# Altium PCB 步进电机驱动板.PcbDoc
Units mil, origin at the board's own origin, x right, y up, seen from the top; angles counter-clockwise.
Board outline 3937.01 x 2795.28 mil, 2 copper layers (Top Layer, Bottom Layer); 91 components, 51 nets, 295 pads, 58 vias.
Unrouted connection lines stored in the file: 1.
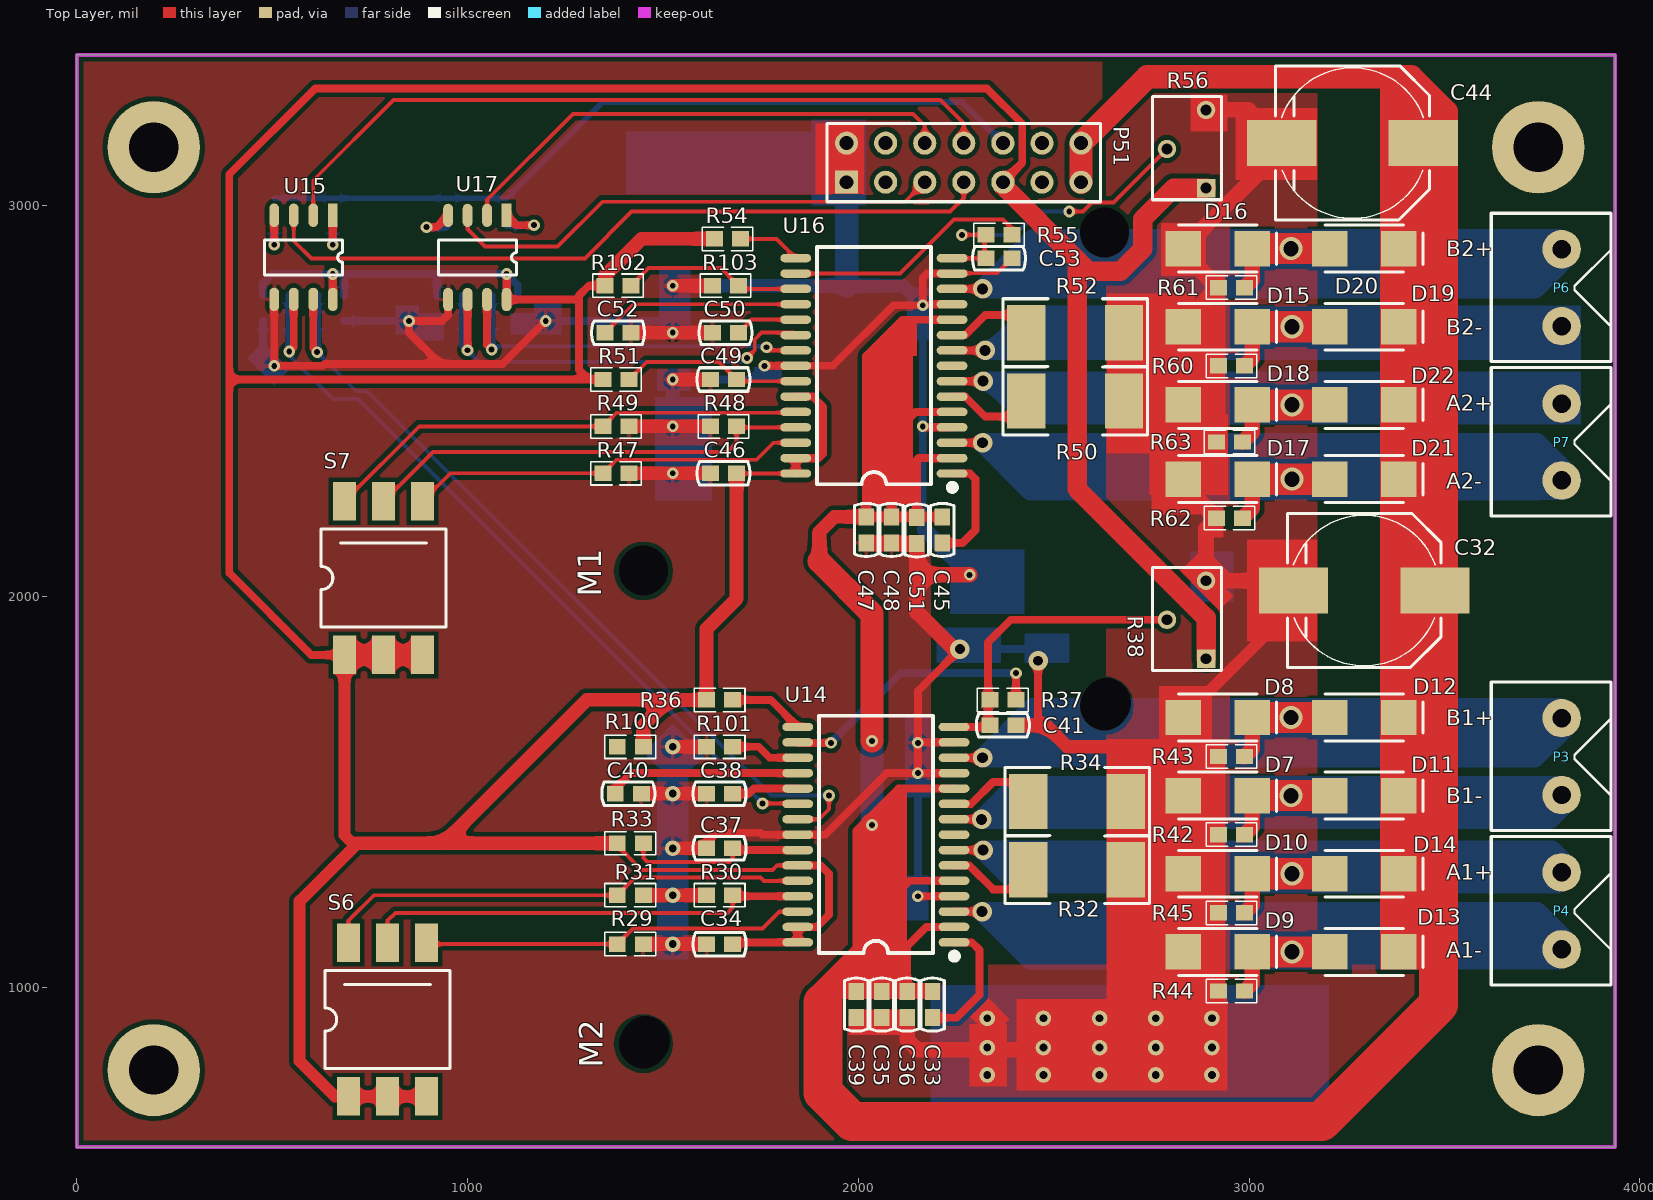
[diagram p0: Top Layer view]
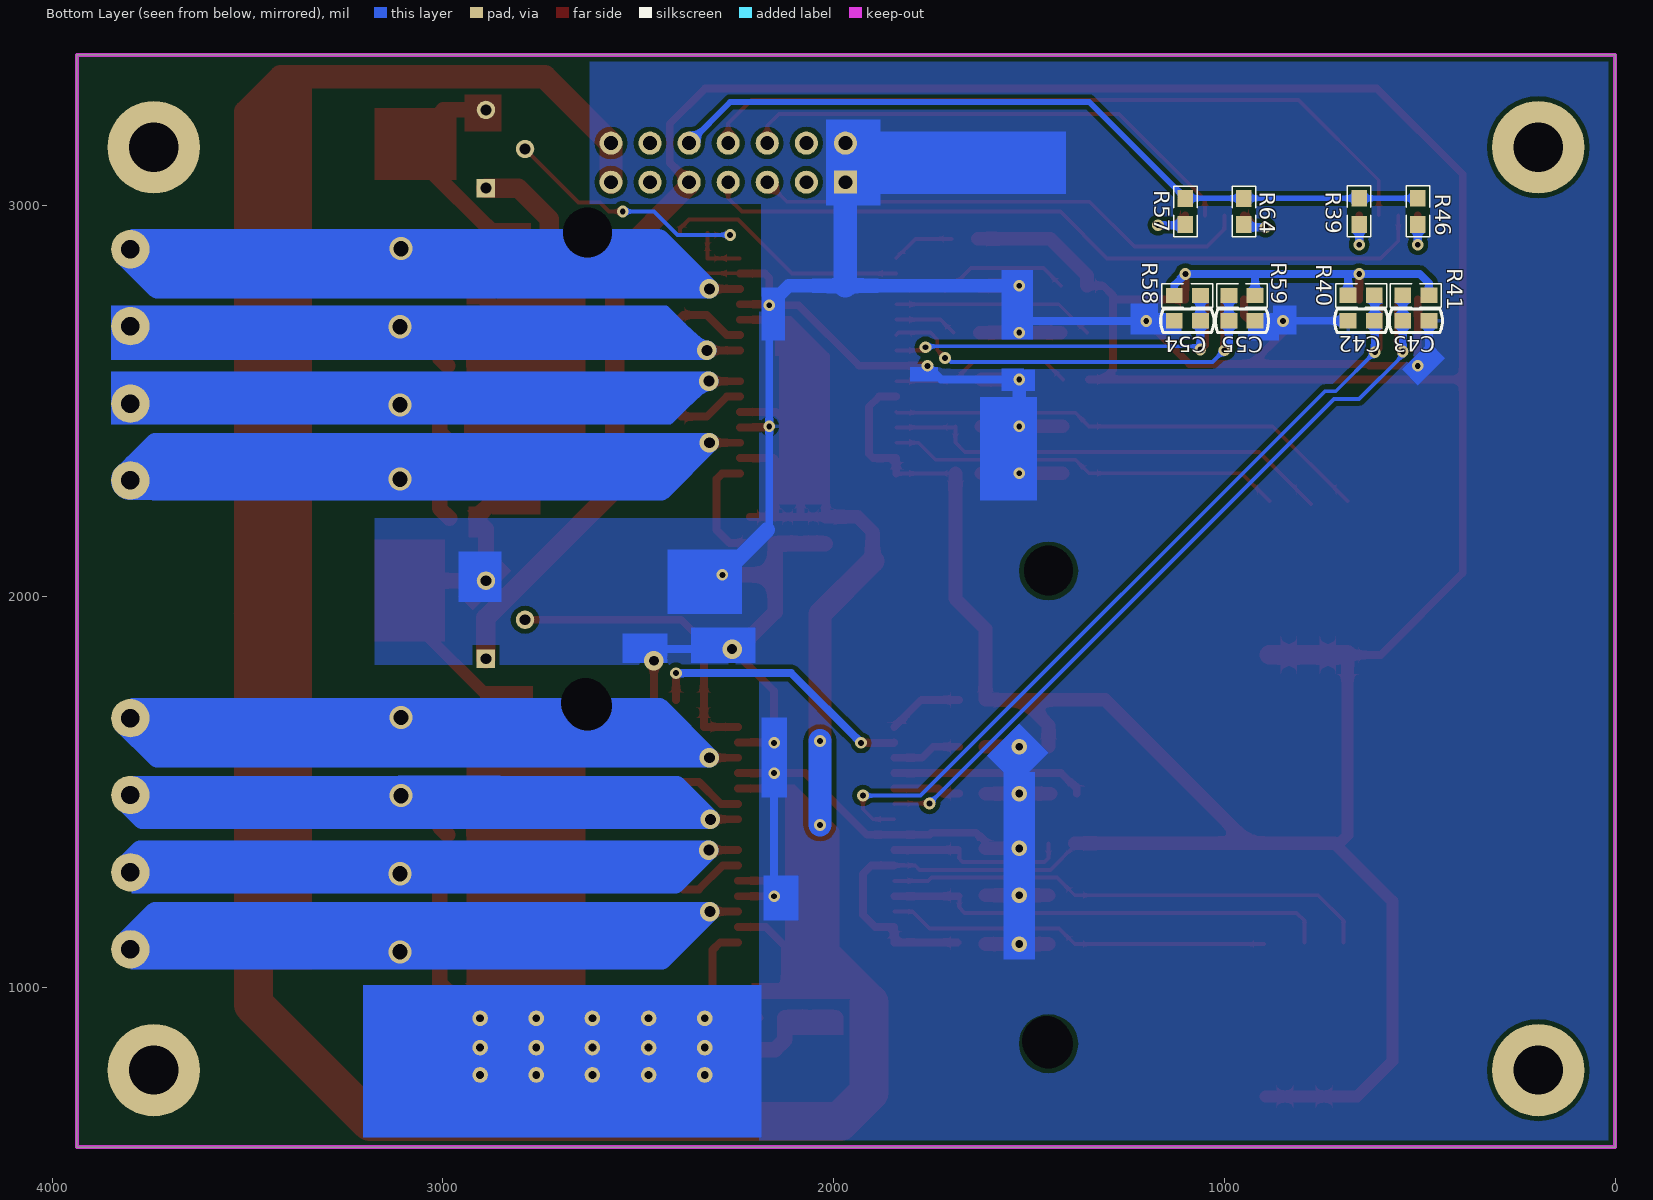
[diagram p1: Bottom Layer view, seen from below]
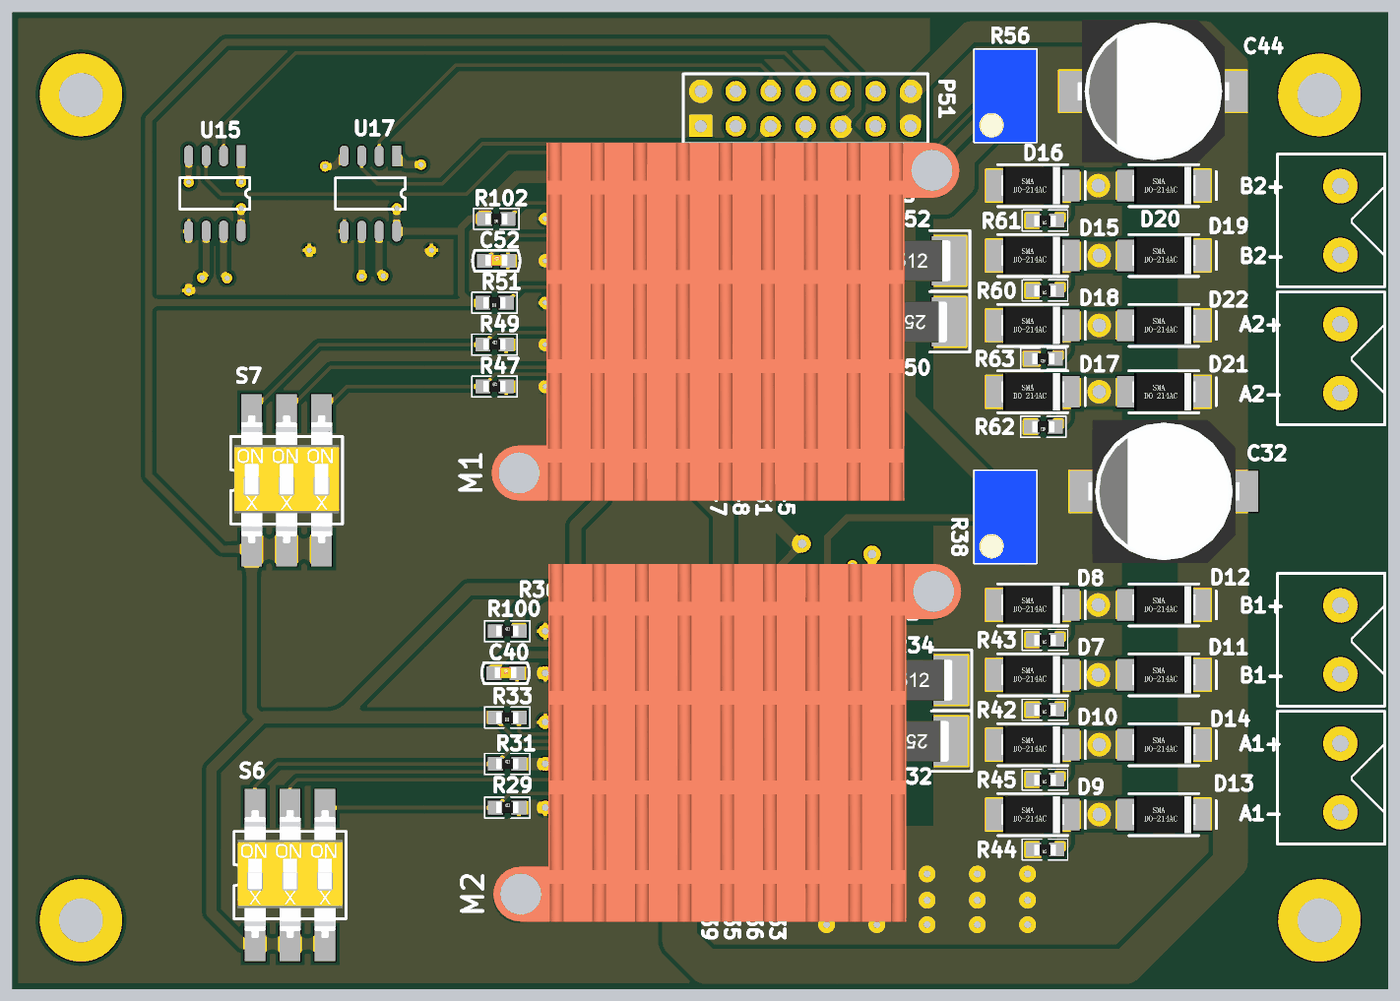
[diagram p2: 3D render of the assembled board from above, using the file's embedded part models]
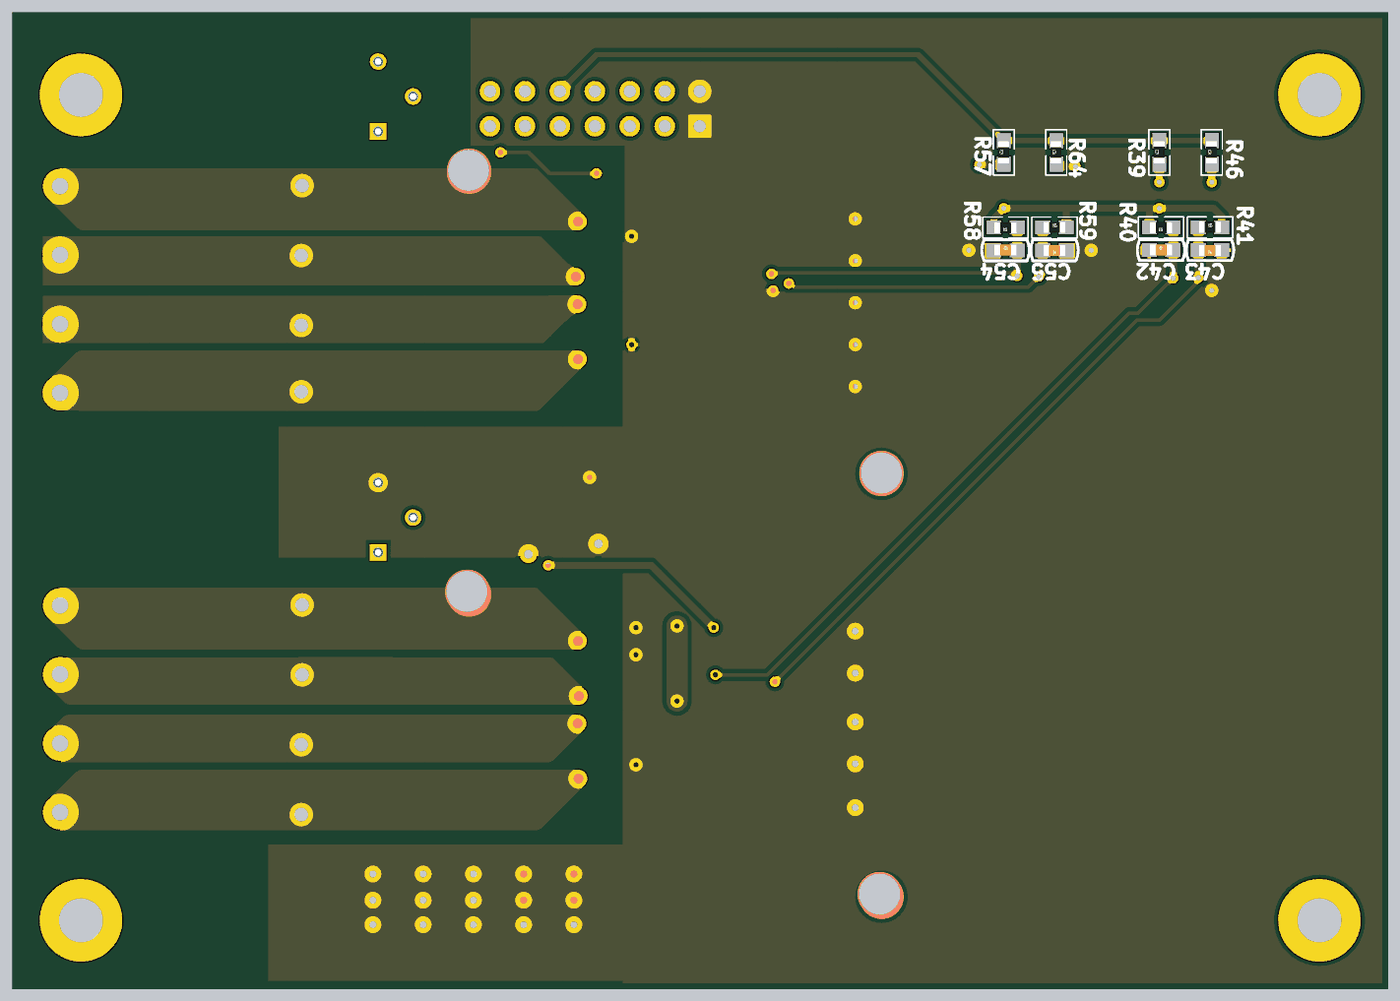
[diagram p3: 3D render of the assembled board from below, using the file's embedded part models]

## Layer stack, top to bottom
Top Solder: solder mask 0.4, Solder Resist, Dk 3.5
Top Layer: signal copper 1.4
Dielectric 1: dielectric 12.6, FR-4, Dk 4.8
Bottom Layer: signal copper 1.4
Bottom Solder: solder mask 0.4, Solder Resist, Dk 3.5

## Board outline
0,590.55 3937.01,590.55 3937.01,3385.83 0,3385.83

## Design rules (kind name [scope] priority, off if disabled: settings)
Clearance [All] p1: gap=7
PolygonConnect [All] p1: connectstyle=Relief reliefconductorwidth=10 reliefentries=4 polygonreliefangle="90 Angle" airgapwidth=10
RoutingVias [All] p1: holewidth=20 width=30 viastyle="Through Hole" minholewidth=15 minwidth=30 maxholewidth=30 maxwidth=60
SolderMaskExpansion [All] p1: expansion=4
Width [All] p1: maxlimit=100 minlimit=10 preferedwidth=20
30 further rules are at their usual default settings.

## Classes and differential pairs
component class 升降电机驱动: C44 C45 C46 C47 C48 C49 C50 C51 C52 C53 C54 C55 D15 D16 D17 D18 D19 D20 D21 D22 P6 P7 R47 R48 R49 R50 R51 R52 R54 R55 R56 R57 R58 R59 R60 R61 R62 R63 R64 R102 R103 S7 U16 U17
component class 搅拌驱动驱动: C32 C33 C34 C35 C36 C37 C38 C39 C40 C41 C42 C43 D7 D8 D9 D10 D11 D12 D13 D14 M1 M2 P3 P4 P51 R29 R30 R31 R32 R33 R34 R36 R37 R38 R39 R40 R41 R42 R43 R44 R45 R46 R100 R101 S6 U14 U15

## Components (designator, comment, footprint, x,y, rotation, side; value= is the part's Value field where it differs from the comment)
C32 "Cap Pol" C-RB-S10 3295,2015 r180 top
C33 "Cap" C-RAD-0603 2190,955 r270 top
C34 "Cap" C-RAD-0603 1645,1110 r180 top
C35 "Cap" C-RAD-0603 2060,955 r90 top
C36 "Cap" C-RAD-0603 2125,955 r90 top
C37 "Cap" C-RAD-0603 1645,1355 r0 top
C38 "Cap" C-RAD-0603 1645,1495 r180 top
C39 "Cap" C-RAD-0603 1995,955 r90 top
C40 "Cap" C-RAD-0603 1411.47,1495 r0 top
C41 "Cap" C-RAD-0603 2370,1670 r180 top
C42 "Cap" C-RAD-0603 650,2705.35 r180 bottom
C43 "Cap" C-RAD-0603 510,2705.35 r0 bottom
C44 "Cap Pol" C-RB-S10 3265,3160 r180 top
C45 "Cap" C-RAD-0603 2215,2170 r270 top
C46 "Cap" C-RAD-0603 1655,2315 r180 top
C47 "Cap" C-RAD-0603 2020,2170 r90 top
C48 "Cap" C-RAD-0603 2085,2170 r90 top
C49 "Cap" C-RAD-0603 1655,2555 r0 top
C50 "Cap" C-RAD-0603 1660,2675 r180 top
C51 "Cap" C-RAD-0603 2150,2168.46 r90 top
C52 "Cap" C-RAD-0603 1385,2675 r0 top
C53 "Cap" C-RAD-0603 2360,2865 r180 top
C54 "Cap" C-RAD-0603 1095,2705 r180 bottom
C55 "Cap" C-RAD-0603 955,2705 r0 bottom
D7 "D-Schottky" DIODE-SMA 2920,1490 r0 top
D8 "D-Schottky" DIODE-SMA 2920,1690 r0 top
D9 "D-Schottky" DIODE-SMA 2920,1090 r0 top
D10 "D-Schottky" DIODE-SMA 2920,1290 r0 top
D11 "D-Schottky" DIODE-SMA 3295,1490 r0 top
D12 "D-Schottky" DIODE-SMA 3295,1690 r0 top
D13 "D-Schottky" DIODE-SMA 3295,1090 r0 top
D14 "D-Schottky" DIODE-SMA 3295,1290 r0 top
D15 "D-Schottky" DIODE-SMA 2920,2690 r0 top
D16 "D-Schottky" DIODE-SMA 2920,2890 r0 top
D17 "D-Schottky" DIODE-SMA 2920,2300 r0 top
D18 "D-Schottky" DIODE-SMA 2920,2490 r0 top
D19 "D-Schottky" DIODE-SMA 3295,2690 r0 top
D20 "D-Schottky" DIODE-SMA 3295,2890 r0 top
D21 "D-Schottky" DIODE-SMA 3295,2300 r0 top
D22 "D-Schottky" DIODE-SMA 3295,2490 r0 top
M1 "散热器" 26*26*10对角37.5 2040,2500 r180 top
M2 "散热器" 26*26*10对角37.5 2045,1295 r180 top
P3 "cnt2p" 接线端子5mm间距2p 3800,1590 r90 top
P4 "cnt2p" 接线端子5mm间距2p 3800,1195 r90 top
P6 "cnt2p" 接线端子5mm间距2p 3800,2790 r90 top
P7 "cnt2p" 接线端子5mm间距2p 3800,2395 r90 top
P51 "Header 7X2" HDR7X2_A1 1970,3060 r0 top
R29 "Res1" 0603-1 1416.54,1110 r0 top
R30 "Res1" 0603-1 1645,1235 r180 top
R31 "Res1" 0603-1 1416.54,1235 r0 top
R32 "Res1" 2512 2560,1300 r180 top
R33 "Res1" 0603-1 1416.54,1368.03 r180 top
R34 "Res1" 2512 2560,1475 r0 top
R36 "Res1" 0603-1 1645,1735 r180 top
R37 "Res1" 0603-1 2370,1735 r180 top
R38 "RPot" VR-3266W 2840,1940 r90 top
R39 "Res1" 0603-1 655,2985.35 r90 bottom
R40 "Res1" 0603-1 650,2770.35 r0 bottom
R41 "Res1" 0603-1 510,2770.35 r180 bottom
R42 "Res1" 0603-1 2955,1390 r180 top
R43 "Res1" 0603-1 2955,1590 r180 top
R44 "Res1" 0603-1 2955,990 r180 top
R45 "Res1" 0603-1 2955,1190 r180 top
R46 "Res1" 0603-1 505,2985.35 r90 bottom
R47 "Res1" 0603-1 1380,2315 r0 top
R48 "Res1" 0603-1 1655,2435 r180 top
R49 "Res1" 0603-1 1380,2435 r0 top
R50 "Res1" 2512 2555,2500 r180 top
R51 "Res1" 0603-1 1380,2555 r180 top
R52 "Res1" 2512 2555,2675 r0 top
R54 "Res1" 0603-1 1665,2915 r180 top
R55 "Res1" 0603-1 2360,2925 r180 top
R56 "RPot" VR-3266W 2840,3145 r90 top
R57 "Res1" 0603-1 1100,2985 r90 bottom
R58 "Res1" 0603-1 1095,2770 r0 bottom
R59 "Res1" 0603-1 955,2770 r180 bottom
R60 "Res1" 0603-1 2955,2590 r180 top
R61 "Res1" 0603-1 2955,2790 r180 top
R62 "Res1" 0603-1 2950,2200 r180 top
R63 "Res1" 0603-1 2950,2395 r180 top
R64 "Res1" 0603-1 950,2985 r90 bottom
R100 "Res1" 0603-1 1416.54,1615 r0 top
R101 "Res1" 0603-1 1645,1615 r180 top
R102 "Res1" 0603-1 1385,2795 r180 top
R103 "Res1" 0603-1 1660,2795 r180 top
S6 "SW3" SW6_3BIT 695,720 r0 top
S7 "SW3" SW6_3BIT 685,1850 r0 top
U14 "THB6128/LV8728" SIOC-30-W 2045,1390 r90 top
U15 "EL0631" EL0631 655,2975.35 r270 top
U16 "THB6128/LV8728" SIOC-30-W 2040,2590 r90 top
U17 "EL0631" EL0631 1100,2975 r270 top

## Footprints (in the part's own frame and the unit in brackets; to place one, negate y for a bottom-side part, rotate by r counter-clockwise, add the part's x,y. Pads: shape width x height; smd on the part's side, far side on the other; paste and mask are expansions set on the pad)
26*26*10对角37.5 [mil]
  round 60 hole 125.98: 0(-590,-432.5) 0(590,432.5)
  body extent -670,-513 669,511, height 591
0603-1 [mm] "贴片带丝印"
  rect 1.1x1 smd: 1(-0.85,0) 2(0.85,0)
  silkscreen extent -1.65,-0.76 1.65,0.76, body extent -0.8,-0.38 0.8,0.42, height 0.3
2512 [mm] "保险丝"
  rect 2.5x3.6 smd: 1(-3.175,0) 2(3.175,0)
  silkscreen extent -4.7,-2.2 4.7,2.2, body extent -3.05,-1.5 3.3,1.5, height 1.6
C-RAD-0603 [mm] "贴片电容"
  rect 1.1x1 smd: 1(-0.85,0) 2(0.85,0)
  silkscreen extent -1.73,-0.76 1.73,0.76, body extent -0.8,-0.38 0.8,0.42, height 0.3
C-RB-S10 [mm] "贴片电解"
  rect 4.5x3 smd: 1(-4.6,0) 2(4.6,0)
  silkscreen extent -5,-5 5,5, body extent -5.5,-5.2 5.5,5.2, height 10.41
DIODE-SMA [mm] "贴片二极管"
  rect 2.3x2.3 smd: 1(-2.25,0) 2(2.25,0)
  silkscreen extent -2.54,-1.52 3.81,1.52, body extent -2.3,-1.35 2.3,1.35, height 2.4
EL0631 [mm]
  rect 1.52x0.64 smd: 1(0,0)
  oval 1.52x0.64 smd: 2(0,-1.27) 3(0,-2.54) 4(0,-3.81) 5(5.47,-3.81) 6(5.47,-2.54) 7(5.47,-1.27) 8(5.47,0)
  silkscreen extent 1.59,-4.44 3.88,0.64
HDR7X2_A1 [mm] "Connector; Header; 7x2 Position"
  rect 1.5x1.5 hole 0.9: 1(0,0)
  round 1.5 hole 0.9: 2(0,2.54) 3(2.54,0) 4(2.54,2.54) 5(5.08,0) 6(5.08,2.54) 7(7.62,0) 8(7.62,2.54) 9(10.16,0) 10(10.16,2.54) 11(12.7,0) 12(12.7,2.54) 13(15.24,0) 14(15.24,2.54)
  silkscreen extent -1.27,-1.27 16.51,3.81
SIOC-30-W [mm]
  oval 0.55x2 smd: 1(-7,-5.08) 2(-6,-5.08) 3(-5,-5.08) 4(-4,-5.08) 5(-3,-5.08) 6(-2,-5.08) 7(-1,-5.08) 8(0,-5.08) 9(1,-5.08) 10(2,-5.08) 11(3,-5.08) 12(4,-5.08) 13(5,-5.08) 14(6,-5.08) 15(7,-5.08) 16(7,5.08) 17(6,5.08) 18(5,5.08) 19(4,5.08) 20(3,5.08) 21(2,5.08) 22(1,5.08) 23(0,5.08) 24(-1,5.08) 25(-2,5.08) 26(-3,5.08) 27(-4,5.08) 28(-5,5.08) 29(-6,5.08) 30(-7,5.08)
  silkscreen extent -8.1,-5.3 7.73,3.7, body extent -7.8,-5.25 7.75,5.25, height 2.37
SW6_3BIT [mm] "贴片拨码开关2.54"
  rect 1.5x2.5 smd: 1(0,0) 2(2.54,0) 3(5.08,0) 4(5.08,10) 5(2.54,10) 6(0,10)
  silkscreen extent -1.52,1.83 6.6,8.18, body extent -1.27,0.43 6.35,9.73, height 4.35
VR-3266W [mm] "3266电位器"
  rect 1.2x1.2 hole 0.7: 1(-2.54,-1.27)
  round 1.2 hole 0.7: 2(0,1.27) 3(2.54,-1.27)
  silkscreen extent -3.3,-2.29 3.41,2.21, body extent -3.3,-2.29 3.4,2.21, height 8.25
接线端子5mm间距2p [mm]
  round 2.5 hole 1.2: 1(-2.5,0) 2(2.5,0)
  silkscreen extent -4.81,-3.24 4.84,4.57, body extent -4.94,-3.11 4.96,4.49, height 10

## Part data
C32 C44: "极性电解电容"
C33 C34 C35 C36 C37 C38 C39 C40 C41 C42 C43 C45 C46 C47 C48 C49 C50 C51 C52 C53 C54 C55: "无极性电容"
D7 D8 D9 D10 D11 D12 D13 D14 D15 D16 D17 D18 D19 D20 D21 D22: "肖特基二极管"
M1 M2: library part 26*26*10散热器, "26*26*10MM散热器孔距37MM"
P51: "Header, 7-Pin"
R29 R30 R31 R32 R33 R34 R36 R37 R39 R40 R41 R42 R43 R44 R45 R46 R47 R48 R49 R50 R51 R52 R54 R55 R57 R58 R59 R60 R61 R62 R63 R64 R100 R101 R102 R103: "贴片电阻"
R38 R56: "精密可调电阻"
S6 S7: "3位编码开关"
U14 U16: library part THB6128, "步进电机驱动"
U15 U17: "双路隔离光耦"

## Free pads (board coordinates)
  round 236.22 hole 125.98: 0(196.85,787.4) 0(196.85,3149.61) 0(3740.16,787.4) 0(3740.16,3149.61)
  round 59.06 hole 125.98: 2(1450,2065) 2(2630,2930) 3(2630,1720) 4(1450,855)
  round 40 hole 20: 14(2330,920) 15(2473.75,920) 16(2617.5,920) 17(2761.25,920) 18(2905,920) 19(2330,845) 20(2473.75,845) 21(2617.5,845) 22(2761.25,845) 23(2905,845) 24(2330,775) 25(2473.75,775) 26(2617.5,775) 27(2761.25,775) 28(2905,775)

## Via types
v1: diameter 30, hole 15, Top Layer to Bottom Layer, 35 vias
v2: diameter 59.06, hole 39.37, Top Layer to Bottom Layer, 8 vias
v3: diameter 50, hole 28, Top Layer to Bottom Layer, 8 vias
v4: diameter 40, hole 20, Top Layer to Bottom Layer, 5 vias
v5: diameter 50, hole 25, Top Layer to Bottom Layer, 2 vias

## Nets (pads, with @x,y where several pads share a name; then routed paths per layer and width w, separated by ;. In a path a pad name is that pad's centre, name@x,y a point inside that pad or via, vN(x,y) a via of type N, cw(c..) or ccw(c..) an arc to the next point about the centre after c; other vN are vias at no path point)
12~24V: 
+5V: C34.1 C46.1 P51.9 R33.2 R36.2 R38.1 R40.2 R41.2 R51.2 R54.2 R56.1 R58.2 R59.2 R100.2 R102.2 S6.1 S6.2 S6.3 S7.1 S7.2 S7.3 U14.25 U14.29 U14.30 U15.8 U16.25 U16.29 U16.30 U17.8 | length 13745.2
  Top Layer w10: R33.2@1383.07,1361.93 1445,1300 1780,1300 1791.26,1311.26 U14.25 ; C46.1@1689.05,2314.41 U16.30
  Top Layer w20: U15.8 v1(655,2825) ; S7.1 600,1850 390,2060 390,2555 ; v1(1100,2825) U17.8 1274.65,2759.65 ; R51.2 1310,2555 ; R102.2 1310,2795 1285,2770 1285,2580 1310,2555 ; C34.1@1682.87,1114.41 U14.30 U14.29 1893.78,1153.78 1925,1185 1925,1290 1903.74,1311.26 U14.25 ; U16.30 U16.29 1898.78,2353.78 1910,2365 1910,2485 1883.74,2511.26 U16.25 ; P51.9 2419.53,3109.53 2419.53,3209.53 2329.06,3300 610,3300 390,3080 390,2555 ; 390,2555 1310,2555
  Top Layer w30: S7.1 685,1388.86 711.93,1361.93 570,1220 570,810 660,720 S6.1 S6.2 S6.3
  Top Layer w35: 718.03,1368.03 938.03,1368.03 ; R102.2 1351.54,2821.54 1445,2915 R54.2 ; R33.2 938.03,1368.03 ; R100.2 1450,1670 1515,1735 ; C46.1 1688.46,1993.46 1611.54,1916.54 R36.2 1515,1735 ; 938.03,1368.03 1305,1735 1515,1735
  Top Layer w50: S7.1 S7.2 S7.3 ; P51.9 2370,3051.42 2560,2861.42 ; R38.1 2890,1945 2560,2275 2560,2861.42 ; R56.1 2807.4,3045 2727.99,2965.59 2727.99,2889.41 2670.59,2832.01 2589.41,2832.01 2560,2861.42
  Bottom Layer w20: R41.2 476.54,2801.54 500,2825 v1(655,2825) ; v1@665,2825 v1(1100,2825) 1128.46,2796.54 R58.2 ; R40.2 683.46,2823.46 ; R59.2 921.54,2823.46
+24V: C32.1 C33.1 C35.2 C36.2 C39.2 C44.1 C45.1 C47.2 C48.2 C51.2 D11.2 D12.2 D13.2 D14.2 D19.2 D20.2 D21.2 D22.2 P51.13 P51.14 U14.2 U14.5 U14.11 U16.2 U16.5 U16.11 | length 9423.2
  Top Layer w20: C35.2 2060,1200 2131.89,1271.89 U14.5 ; C36.2 2125,1105 2173.78,1153.78 U14.2 ; C51.2 C51.2@2150,2203.46 ; C33.1 C39.2 1995,1400 2103.11,1508.11 U14.11 ; C45.1 C51.2@2150,2203.46 ; U16.2 2153.78,2353.78 2150,2350 C51.2@2150,2203.46 ; U16.5 2146.89,2471.89 2085,2410 C48.2 ; U16.11 2113.11,2708.11 2020,2615 C47.2 C48.2 ; C48.2 C51.2@2150,2203.46
  Top Layer w35: 1900,2090 1900,2165 1938.46,2203.46 C47.2
  Top Layer w60: 1900,2090 2035,1955 v1(2035,1630) ; 2035,1400 v1(2035,1415) ; P51.13 P51.14 2740,3330 3415,3330 3505,3240 ; D13.2 D14.2 D11.2 D12.2 3476.1,1782.52 C32.1 3476.1,2207.48 D21.2 D22.2 D19.2 D20.2 3446.1,2952.52 C44.1
  Top Layer w100: 1910,960 1910,730 1984.45,655.55 3185.55,655.55 3485,955 3485,1070
  Bottom Layer w60: v1(2035,1415) v1(2035,1630)
A1+: D9.2 D13.1 P4.1 R44.1 U14.3 | length 2756.2
  Top Layer w20: U14.3 v3(2316.85,1193.15)
  Top Layer w40: R44.1 3008.58,1010.12 D9.2
  Top Layer w80: D9.2 v2(3110,1090) D13.1
  Bottom Layer w20: 2510,1096.57 2915,1096.57
  Bottom Layer w50: 2510,1070 2440,1070 v3(2316.85,1193.15) 3736.85,1193.15 P4.1@3817.5,1112.5
  Bottom Layer w100: 2915,1096.57 v2@3110,1096.57
A1-: D10.2 D14.1 P4.2 R45.1 U14.7 | length 2726.2
  Top Layer w20: U14.7 v3(2319.37,1350.63)
  Top Layer w40: R45.1 3008.58,1210.12 D10.2
  Top Layer w80: D10.2 v2(3110,1290) D14.1
  Bottom Layer w20: 2745,1293.43 2798.43,1293.43
  Bottom Layer w50: 2745,1265 2405,1265 v3(2319.37,1350.63) 3774.37,1350.63 P4.2@3820,1305
  Bottom Layer w100: 2798.43,1293.43 v2@3110,1293.43
A2+: D17.2 D21.1 P7.1 R62.1 U16.3 | length 2875.4
  Top Layer w20: U16.3 v3(2318.15,2393.15)
  Top Layer w40: R62.1 3008.58,2225.12 D17.2
  Top Layer w80: D17.2 v2(3110,2300) D21.1
  Bottom Layer w20: 2765,2296.57 2816.57,2296.57
  Bottom Layer w50: 2765,2270 2441.3,2270 v3(2318.15,2393.15) 3736.85,2393.15 P7.1@3817.5,2312.5
  Bottom Layer w100: 2816.57,2296.57 v2@3110,2296.57 ; 3686.57,2296.57 P7.1
A2-: D18.2 D22.1 P7.2 R63.1 U16.7 | length 2333.3
  Top Layer w20: U16.7 v3(2319.37,2550.63)
  Top Layer w40: R63.1 3008.58,2420.12 D18.2
  Top Layer w80: D18.2 v2(3110,2490) D22.1
  Bottom Layer w20: v3(2319.37,2550.63) 2376.57,2493.43 ; 2725,2450 2420,2450 2376.57,2493.43 ; 2780,2493.43 2376.57,2493.43
  Bottom Layer w50: v3(2319.37,2550.63) 2399.37,2550.63
  Bottom Layer w100: 2780,2493.43 P7.2
B1+: D7.2 D11.1 P3.1 R42.1 U14.9 | length 2725.9
  Top Layer w20: U14.9 v3(2315.63,1429.37)
  Top Layer w40: R42.1 3008.58,1410.12 D7.2
  Top Layer w80: D7.2 v2(3107.5,1490) D11.1
  Bottom Layer w20: 2795,1491.57 2860,1491.57
  Bottom Layer w50: 2795,1515 2401.26,1515 v3(2315.63,1429.37) 3769.37,1429.37 P3.1@3817.5,1477.5
  Bottom Layer w100: 2860,1491.57 v2@3107.5,1491.57
B1-: D8.2 D12.1 P3.2 pad.3 R43.1 U14.13 | length 2760.1
  Top Layer w20: U14.13 v3(2318.15,1586.85)
  Top Layer w40: R43.1 3008.58,1610.12 D8.2
  Top Layer w80: D8.2 v2(3107.5,1690) D12.1
  Bottom Layer w20: 2780,1688.43 2848.43,1688.43
  Bottom Layer w50: 2780,1715 2446.3,1715 v3(2318.15,1586.85) 3731.85,1586.85 P3.2@3820,1675
  Bottom Layer w100: 2848.43,1688.43 v2@3107.5,1688.43
B2+: D15.2 D19.1 P6.1 R60.1 U16.9 | length 2413.3
  Top Layer w20: U16.9 v3(2324.37,2629.37)
  Top Layer w40: R60.1 3008.58,2610.12 D15.2
  Top Layer w80: D15.2 v2(3110,2690) D19.1
  Bottom Layer w20: v3(2324.37,2629.37) 2386.57,2691.57 ; 2780,2735 2430,2735 2386.57,2691.57 ; 2811.57,2691.57 2386.57,2691.57
  Bottom Layer w50: v3(2324.37,2629.37) 2434.37,2629.37
  Bottom Layer w100: 2811.57,2691.57 P6.1
B2-: D16.2 D20.1 P6.2 pad.2@2630,2930 R61.1 U16.13 | length 2759.2
  Top Layer w20: U16.13 v3(2318.15,2786.85)
  Top Layer w40: R61.1 3008.58,2810.12 D16.2
  Top Layer w80: D16.2 v2(3107.5,2890) D20.1
  Bottom Layer w20: 2465,2930 2816.85,2930 2858.43,2888.43
  Bottom Layer w50: 2445.65,2914.35 v3(2318.15,2786.85) 3731.85,2786.85 P6.2@3817.5,2872.5
  Bottom Layer w100: 2858.43,2888.43 v2@3107.5,2888.43
CLK1: C43.2 R41.1 U14.21 U15.6 | length 2069
  Top Layer w10: v1(1755,1470) 1843.74,1470 U14.21
  Top Layer w20: v1(543.46,2626.54) 555,2638.07 U15.6
  Bottom Layer w10: v1(543.46,2626.54) 543.46,2616.54 655,2505 720,2505 v1(1755,1470)
  Bottom Layer w20: v1(543.46,2626.54) R41.1
CLK2: C55.2 R59.1 U16.21 U17.6 | length 1176.6
  Top Layer w10: v1(1715,2610) 1735,2630 1735,2657.43 1752.57,2675 1833.74,2675 U16.21
  Top Layer w20: v1(1000,2630) U17.6
  Bottom Layer w10: v1(1000,2630) 1030,2600 1700,2600 1710,2610 v1(1715,2610)
  Bottom Layer w20: R59.1 988.46,2641.54 v1(1000,2630)
CW1: C42.2 R40.1 U14.22 U15.7 | length 2190.9
  Top Layer w10: U14.22 1899.37,1429.37 1925,1455 v1(1925,1490)
  Top Layer w20: U15.7 605,2635 v1(615,2625)
  Bottom Layer w10: v1(615,2625) 715,2525 742.43,2525 1777.43,1490 v1(1925,1490)
  Bottom Layer w20: v1(615,2625) 615,2768.82 R40.1
CW2: C54.2 R58.1 U16.22 U17.7 | length 1060.7
  Top Layer w10: v1(1765,2637.5) 1765,2635 1770.63,2629.37 U16.22
  Top Layer w20: U17.7 1050,2643.07 v1(1061.54,2631.54)
  Bottom Layer w10: v1(1061.54,2631.54) 1070,2640 1765,2640 v1(1765,2637.5)
  Bottom Layer w20: v1(1061.54,2631.54) C54.2 R58.1
DIR1: P51.8 U15.2 | length 1914.4
  Top Layer w10: U15.2 605,3065 810,3270 2210,3270 2270,3210 P51.8
DIR2: P51.6 U17.2 | length 1308.6
  Top Layer w10: U17.2 1050,3015 1270,3235 2140,3235 2170,3205 P51.6
GND: C32.2 C34.2 C35.1 C36.1 C37.1 C38.2 C39.1 C40.2 C41.1 C42.1 C43.1 C44.2 C46.2 C47.1 C48.1 C49.1 C50.2 C51.1 C52.2 C53.1 C54.1 C55.1 D7.1 D8.1 D9.1 D10.1 D15.1 D16.1 D17.1 D18.1 P51.1 P51.2 pad.14 pad.15 pad.16 pad.17 pad.18 pad.19 pad.20 pad.21 pad.22 pad.23 pad.24 pad.25 pad.26 pad.27 pad.28 R29.2 R30.2 R31.2 R32.1 R34.2 R38.3 R42.2 R43.2 R44.2 R45.2 R47.2 R48.2 R49.2 R50.1 R52.2 R56.3 R60.2 R61.2 R62.2 R63.2 R101.2 R103.2 U14.4 U14.12 U14.14 U14.23 U15.5 U16.4 U16.12 U16.14 U16.23 U17.5 | length 15218.3
  Top Layer w10: U16.14 2240.63,2826.85 2355.31,2826.85 C53.1
  Top Layer w20: U15.5 v1(505,2590) 629.5,2590 634.5,2595 930,2595 ; U17.5 950,2720 935,2705 v1(850,2705) 850,2675 930,2595 ; v1(1200,2705) 1090,2595 930,2595 ; C37.1 1611.54,1371.54 1635,1395 1750,1395 1755,1390 U14.23 1915,1390 2072.48,1547.48 v1(2152.48,1547.48) ; v1(1760,2590) U16.23 1935,2590 2090,2745 v1(2165,2745) ; v1(2152.48,1232.52) U14.4 ; v1(2165,2435) 2167.48,2432.52 U16.4 ; U16.12 2167.48,2747.48 v1(2165,2745) ; U16.14 2176.22,2826.22 2165,2815 v1(2165,2745) ; U14.12 v1(2152.48,1547.48) ; U14.14 v1@2152.48,1626.22 ; v5(2260,1865) 2152.48,1757.48 v1@2152.48,1626.22 ; v5(2460,1835) 2460,1690 2480,1670 ; v1(2152.48,1547.48) v1(2152.48,1624.96) v1@2152.48,1626.22
  Top Layer w30: D8.1 C32.2@3113.9,1972.48
  Top Layer w35: R47.2 v1(1525,2315) C46.2 ; R49.2 v1(1525,2435) R48.2 ; C52.2 v1(1525,2675) C50.2 ; C40.2 v4(1525,1495) C38.2 ; R29.2 v4(1525,1110) C34.2 ; R31.2 v4(1525,1235) R30.2 ; v4(1525,1355) C37.1 ; v4(1525,1615) R101.2 ; v1(1525,2555) C49.1 ; v1(1525,2795) R103.2 ; C41.1 2480,1670 2535,1615 2660,1615
  Top Layer w40: C39.1 C35.1 C36.1 2125,865 2150,840 2845,840 2921.54,916.54 R44.2 2831.42,1080.12 D9.1 2831.42,1099.88 R45.2 2921.54,1199.88 D10.1 ; C47.1@2021.54,2135 C51.1 2150,2055 ; v5(2260,1865) 2245,1865 2150,1960 2150,2055 ; v1(2285,2055) 2150,2055 ; R32.1@2695,1290 D10.1 ; R34.2@2700,1490 D7.1 ; 2875.77,1635.77 R43.2 2831.42,1499.88 D7.1 ; R56.3 2998.9,3245 C44.2 3083.9,3142.48 D16.1 2831.42,2880.12 R61.2 2831.42,2699.88 D15.1 ; R60.2 2921.54,2599.88 D15.1 ; C32.2@3113.9,1972.48 C32.2 3088.9,2040 R38.3 2890,2173.46 R62.2 2831.42,2285.12 D17.1 2916.54,2385.12 R63.2 2831.42,2480.12 D18.1 2821.42,2500 R50.1 R52.2 2816.42,2675 D15.1 ; D10.1 2831.42,1299.88 R42.2 2921.54,1399.88 D7.1
  Top Layer w60: P51.1@1970,3065 P51.2
  Top Layer w90: 2831.42,1591.42 D8.1
  Bottom Layer w20: C43.1 476.54,2618.46 v1(505,2590) ; C42.1 v1@849.65,2705.35 ; v1(850,2705) C55.1 ; C54.1 v1(1200,2705) 1495,2705 v1(1525,2675) ; v1(1525,2555) 1725,2555 v1(1760,2590) ; v1(2152.48,1232.52) v1(2152.48,1547.48) ; v1(2165,2745) v1(2165,2435) 2165,2175 2170,2170 ; v5(2260,1865) 2430,1865 v5(2460,1835)
  Bottom Layer w35: v4(1525,1110) v4(1525,1235) v4(1525,1355) v4(1525,1495) v4(1525,1615) ; v1(1525,2315) v1(1525,2435) v1(1525,2555) ; v1(1525,2675) v1(1525,2795) 1970,2795 2115,2795 v1(2165,2745)
  Bottom Layer w40: 2170,2170 v1(2285,2055)
  Bottom Layer w60: 1970,2795 P51.1
M1_1: R29.1 S6.4 U14.28 | length 980.7
  Top Layer w10: S6.4@898.7,1110 R29.1 1423.07,1150 1755,1150 1798.15,1193.15 U14.28
M1_2: R30.1 S6.5 U14.27 | length 1149.2
  Top Layer w10: S6.5 795,1170 815,1190 1665,1190 1678.46,1203.46 R30.1
  Top Layer w20: R30.1@1680.94,1232.52 U14.27
M1_3: R31.1 S6.6 U14.26 | length 1255.2
  Top Layer w10: S6.6 695,1170 760,1235 R31.1 1428.07,1280 1750,1280 1758.11,1271.89 U14.26
M2_1: R47.1 S7.4 U16.28 | length 1016.9
  Top Layer w10: S7.4 956.3,2315 R47.1 1381.22,2349.69 1739.69,2349.69 1783.15,2393.15 U16.28
M2_2: R48.1 S7.5 U16.27 | length 1165.8
  Top Layer w10: S7.5@778.17,2236.83 911.03,2369.69 1664.69,2369.69 1688.46,2393.46 R48.1 ; R48.1@1690.94,2432.52 U16.27
M2_3: R49.1 S7.6 U16.26 | length 1249.5
  Top Layer w10: S7.6 876.3,2435 R49.1 1381.54,2470 1838.11,2470 U16.26
NetC33_2: C33.2 U14.1 | length 332.3
  Top Layer w20: C33.2 2251.54,921.54 2310,980 2310,1095 2290.59,1114.41 U14.1
NetC37_2: C37.2 R33.1 U14.24 | length 462.8
  Top Layer w10: R33.1 1450,1330 1460,1320 1670,1320 1678.46,1328.46 C37.2
  Top Layer w20: C37.2@1682.83,1350.63 U14.24
NetC38_1: C38.1 U14.20 | length 172
  Top Layer w20: C38.1 1720,1495 1733.11,1508.11 U14.20
NetC40_1: C40.1 U14.19 | length 496.4
  Top Layer w20: C40.1 1378.01,1508.01 1417.48,1547.48 U14.19
NetC41_2: C41.2 R37.2 R38.2 U14.15 | length 785.5
  Top Layer w20: U14.15 2332.13,1665.59 2332.13,1882.13 2390,1940 R38.2
NetC45_2: C45.2 U16.1 | length 294.8
  Top Layer w20: C45.2 2266.54,2136.54 2300,2170 2300,2300 2285.59,2314.41 U16.1
NetC49_2: C49.2 R51.1 U16.24 | length 459.4
  Top Layer w10: R51.1 1458.46,2600 1643.46,2600 C49.2 ; C49.2@1692.83,2550.63 U16.24
NetC50_1: C50.1 U16.20 | length 160.3
  Top Layer w10: C50.1 1726.57,2708.11 U16.20
NetC52_1: C52.1 U16.19 | length 518.5
  Top Layer w10: C52.1 1424.02,2747.48 U16.19
NetC53_2: C53.2 R55.2 R56.2 U16.15 | length 816.7
  Top Layer w10: U16.15@2240.59,2865 2323.07,2865 R55.2@2323.07,2930 ; v1(2265,2925) R55.2@2318.07,2925 ; v1(2540,2985) 2574.7,2985 2597.69,3007.99 2652.99,3007.99 R56.2
  Bottom Layer w10: v1(2265,2925) 2399.73,2925 2459.73,2985 v1(2540,2985)
NetR32_2: R32.2 U14.6 | length 236.1
  Top Layer w20: U14.6 2283.74,1311.26 2345,1250 2385,1250 R32.2
NetR34_1: R34.1 U14.10 | length 234
  Top Layer w20: U14.10 2245.13,1468.87 2288.66,1468.87 2344.79,1525 2385,1525 R34.1
NetR36_1: R36.1 U14.16 | length 195.3
  Top Layer w20: R36.1 1775.59,1735 U14.16
NetR37_1: R37.1 U14.17 | length 701.4
  Top Layer w20: U14.17 1846.22,1625 v1(1930,1625) ; R37.1 v1(2403.46,1803.46)
  Bottom Layer w20: v1(1930,1625) 2108.46,1803.46 v1(2403.46,1803.46)
NetR39_1: R39.1 U15.1 | length 127.2
  Top Layer w20: v1(655,2900) U15.1
  Bottom Layer w20: v1(655,2900) R39.1
NetR46_1: R46.1 U15.4 | length 127.2
  Top Layer w20: v1(505,2900) U15.4
  Bottom Layer w20: v1(505,2900) R46.1
NetR50_2: R50.2 U16.6 | length 227.8
  Top Layer w20: U16.6 2273.74,2511.26 2325,2460 2390,2460 R50.2
NetR52_1: R52.1 U16.10 | length 229.9
  Top Layer w20: U16.10 2273.74,2668.74 2325,2720 2385,2720 R52.1
NetR54_1: R54.1 U16.16 | length 162
  Top Layer w10: R54.1 1790.59,2915 U16.16
NetR55_1: R55.1 U16.17 | length 637.2
  Top Layer w10: U16.17 2106.22,2826.22 2245,2965 2370,2965 2393.46,2941.54 R55.1
NetR57_1: R57.1 U17.1 | length 151
  Top Layer w20: U17.1 1125,2950 v1(1170,2950)
  Bottom Layer w20: R57.1 1101.54,2950 v1(1170,2950)
NetR64_1: R64.1 U17.4 | length 125.1
  Top Layer w20: v1(895,2945) 920,2945 U17.4
  Bottom Layer w20: v1(895,2945) 943.46,2945 R64.1
NetR100_1: R100.1 R101.1 U14.18 | length 178.2
  Top Layer w20: R101.1 1745,1615 1773.15,1586.85 U14.18
NetR102_1: R102.1 R103.1 U16.18 | length 450.7
  Top Layer w10: R102.1 1463.46,2840 1648.46,2840 R103.1 ; R103.1@1701.61,2786.85 U16.18
PWM1: P51.7 U15.3 | length 1903.2
  Top Layer w10: U15.3 555,2910 600,2865 1300,2865 1420,2985 2235,2985 2270,3020 P51.7
PWM2: P51.5 U17.3 | length 1292
  Top Layer w10: U17.3 1000,2940 1045,2895 1230,2895 1345,3010 2120,3010 P51.5
VCC3.3: P51.10 R39.2 R46.2 R57.2 R64.2 | length 2010.5
  Bottom Layer w15: R46.2 R39.2 1099.65,3018.82 1345.83,3265 2265,3265 P51.10
pads on no net: M1.0 M2.0 P51.3 P51.4 P51.11 P51.12 U14.8 U16.8

## Polygon pours and split planes (outlines as drawn)
GND on Top Layer "Top Layer-No Net" (solid, remove dead copper, pour order 0): 2635,1635 2635,1695 2635,3225 2740,3330 3175,3330 3175,1075 2920,820 2835,820
GND on Top Layer "Top Layer-No Net" (solid, remove dead copper, pour order 8): 2141.31,952.28 1936.31,952.28 1936.31,742.28 1946.31,732.28 2016.31,662.28 2181.31,662.28 3141.31,662.28 3461.31,982.28 3471.31,992.28 3471.31,1057.28 2311.31,1057.28 2311.31,992.28 2252.84,933.81 2191.31,933.81
GND on Top Layer "Top Layer-No Net" (solid, remove dead copper, pour order 12): 2625,3385.83 2625,3012.99 2620,3007.99 2617.99,3010 1920,3010 2180,3010 2185,3005 2185,2950 2185,590.55 0,590.55 0,3385.83
GND on Bottom Layer "Top Layer-No Net" (solid, remove dead copper, pour order 2): 2000,3190 2000,3385.83 0,3385.83 0,590.55 2004.45,590.55 2005,590 2005,780 2005,3185 2000,3190
GND on Bottom Layer "Top Layer-No Net" (solid, remove dead copper, pour order 4): 2185,2745 2185,2815 2185,3385.83 1968.5,3385.83 1968.5,590.55 2190,590.55 2190,2740 2185,2745
GND on Bottom Layer "Top Layer-No Net" (solid, remove dead copper, pour order 6): 2180,1825 2275,1825 3175,1825 3175,2200 2165,2200 2135,2170
GND on Bottom Layer "Top Layer-No Net" (solid, remove dead copper, pour order 10): 2180,3005 2625,3005 2625,3385.83 1970.83,3385.83 1965,3380 1910,3325 1910,3160

## Keep-outs
Keep-Out Layer:
  the board outline again, w10

## Other copper
Top Layer:
  rectangle net GND: 2635,940 2940,1545
  rectangle net GND: 2635,1545 2940,1635
  rectangle net GND: 2635,845 2840,940
  rectangle net GND: 2825,860 2875,955
  rectangle net GND: 2865,890 2905,970
  rectangle net GND: 2635,2430 2940,2745
  rectangle net +24V: 3335,1045 3535,3235
  rectangle net +24V: 3335,3235 3475,3305
  rectangle net +24V: 1975,970 2210,1010
  rectangle net +24V: 1995,1010 2125,1400
  rectangle net +24V: 2090,1400 2125,1500
  rectangle net +24V: 2065,1400 2090,1480
  rectangle net +24V: 2045,1400 2065,1460
  rectangle net +24V: 2025,1400 2045,1435
  rectangle net +24V: 2010,1400 2025,1420
  rectangle net +24V: 2035,1435 2045,1440
  rectangle net +24V: 2085,1470 2095,1490
  rectangle net +24V: 2005,1395 2015,1410
  rectangle net +24V: 2020,2235 2140,2615
  rectangle net +24V: 2100,2615 2150,2700
  rectangle net +24V: 2080,2605 2100,2685
  rectangle net +24V: 2066.56,2615 2080,2661.56
  rectangle net +24V: 2055,2615 2066.56,2650
  rectangle net +24V: 2045,2615 2055,2640
  rectangle net +24V: 2030,2615 2045,2630
  rectangle net +24V: 1910,970 1975,1010
  rectangle net GND: 2965,3065 3175,3250
  rectangle net GND: 2850,3190 2945,3285
  rectangle net GND: 2775,2819.68 2889.88,2955
  rectangle net GND: 2635,2365 2760,2775
  rectangle net GND: 2745,2260 2945.64,2465
  rectangle net GND: 2750,2210 2875,2290
  rectangle net GND: 2895,2150 2935,2230
  rectangle net GND: 2995,1885 3175,2145
  rectangle net GND: 2770,1635.16 2904.72,1770
  rectangle net GND: 2907.32,2747.24 2940,2825
  rectangle net GND: 2745,2730 2861.54,2775
  region net GND: 2895,1995 2955,2055 2884.86,2125.14 2824.86,2065.14
  region net GND: 2923.89,1963.89 2960,2000 2887.65,2072.35 2851.54,2036.24
  rectangle net GND: 1975,877.25 2125,921.54
  region net +24V: 1927.5,942.5 2072.5,1087.5 2020,1140 1875,995
  rectangle net GND: 1890,3030 2015,3210
  rectangle net GND: 2405,735 2945,970
  rectangle net GND: 2285,745 2380,905
  region net GND: 2338.96,869.71 2387.12,917.88 2333.36,971.64 2285.19,923.47
Bottom Layer:
  rectangle net B2+: 2385,2605 3850,2691.57
  rectangle net A2-: 2375,2493.43 3850,2575
  rectangle net A2-: 2420,2440 3850,2493.43
  rectangle net B2+: 2430,2670 3850,2745
  rectangle net A2+: 2441.3,2245 3745,2393.15
  rectangle net A2+: 3715,2330 3755,2365
  rectangle net A2+: 2375,2310 2455,2375
  rectangle net A2+: 2400,2290 2475,2335
  rectangle net A2-: 2395,2460 2430,2493.43
  rectangle net A2-: 2355,2505 2390,2530
  rectangle net B2+: 2360,2650 2395,2675
  rectangle net B2+: 2410,2700 2440,2725
  rectangle net B2+: 2375,2675 2395,2680
  rectangle net B2-: 2461.3,2810 3770,2930
  rectangle net B2-: 2470,2905 3800,2940
  rectangle net B2-: 2445,2870 2500,2940
  rectangle net B2-: 2375,2800 2475,2850
  rectangle net B2-: 2410,2830 2490,2885
  rectangle net A1+: 2500,1045 3785,1175
  rectangle net A1+: 3785,1045 3800,1096.57
  rectangle net A1+: 2375,1110 2530,1180
  rectangle net A1+: 2420,1080 2535,1125
  rectangle net A1-: 2380,1270 2815,1340
  rectangle net A1-: 2660,1240 3797.19,1327.82
  rectangle net B1+: 2365,1445 2885,1505
  rectangle net B1+: 2640,1470 3800,1540
  rectangle net B1+: 3070,1440 3800,1491.57
  rectangle net B1-: 2470,1670 3800,1740
  rectangle net B1-: 2440,1605 3765,1685
  rectangle net B1-: 2375,1595 2480,1655
  rectangle net B1-: 2405,1630 2455,1685
  rectangle net B1-: 2425,1665 3755,1710
  rectangle net GND: 1405,3030 2000,3190
  rectangle net GND: 1485,1070 1565,1550
  rectangle net GND: 1512.41,2525 1570,2582.67
  rectangle net GND: 1485,2525 1550,2580
  rectangle net GND: 1480,2245 1625,2510
  rectangle net GND: 1732.59,2550 1805,2586.42
  rectangle net GND: 1490,2657.33 1570,2835
  rectangle net GND: 815,2670 875,2745
  rectangle net GND: 860,2655 940,2725
  rectangle net GND: 1170,2670 1240,2750
  rectangle net GND: 1110,2670 1185,2725
  rectangle net GND: 2125,2655 2185,2790
  rectangle net GND: 2120,1485 2185,1690
  rectangle net GND: 2090,1170 2180,1285
  rectangle net GND: 2850,1985 2960,2115
  rectangle net GND: 2235,1955 2425,2120
  rectangle net GND: 2200,1830 2365,1920
  rectangle net GND: 2425.16,1829.77 2540,1905
  rectangle net GND: 1880,3000 2020,3220
  rectangle net GND: 2185,615 3205,1005
  region net GND: 1532.5,1517.5 1607.5,1592.5 1525,1675 1450,1600
  region net GND: 505,2540 545.92,2580.92 475.92,2650.92 435,2610

## Silkscreen, mask and mechanical layers (free items; w line width, h text height)
Top Overlay:
  text "B2+" at 3505,2870 h40
  text "B2-" at 3505,2670 h40
  text "A2+" at 3505,2475 h40
  text "A2-" at 3505,2275 h40
  text "B1+" at 3505,1670 h40
  text "B1-" at 3505,1470 h40
  text "A1+" at 3505,1275 h40
  text "A1-" at 3505,1075 h40